# EAGLE board piezo-preamp-tickler_V0-3 (EAGLE 7.5.0)
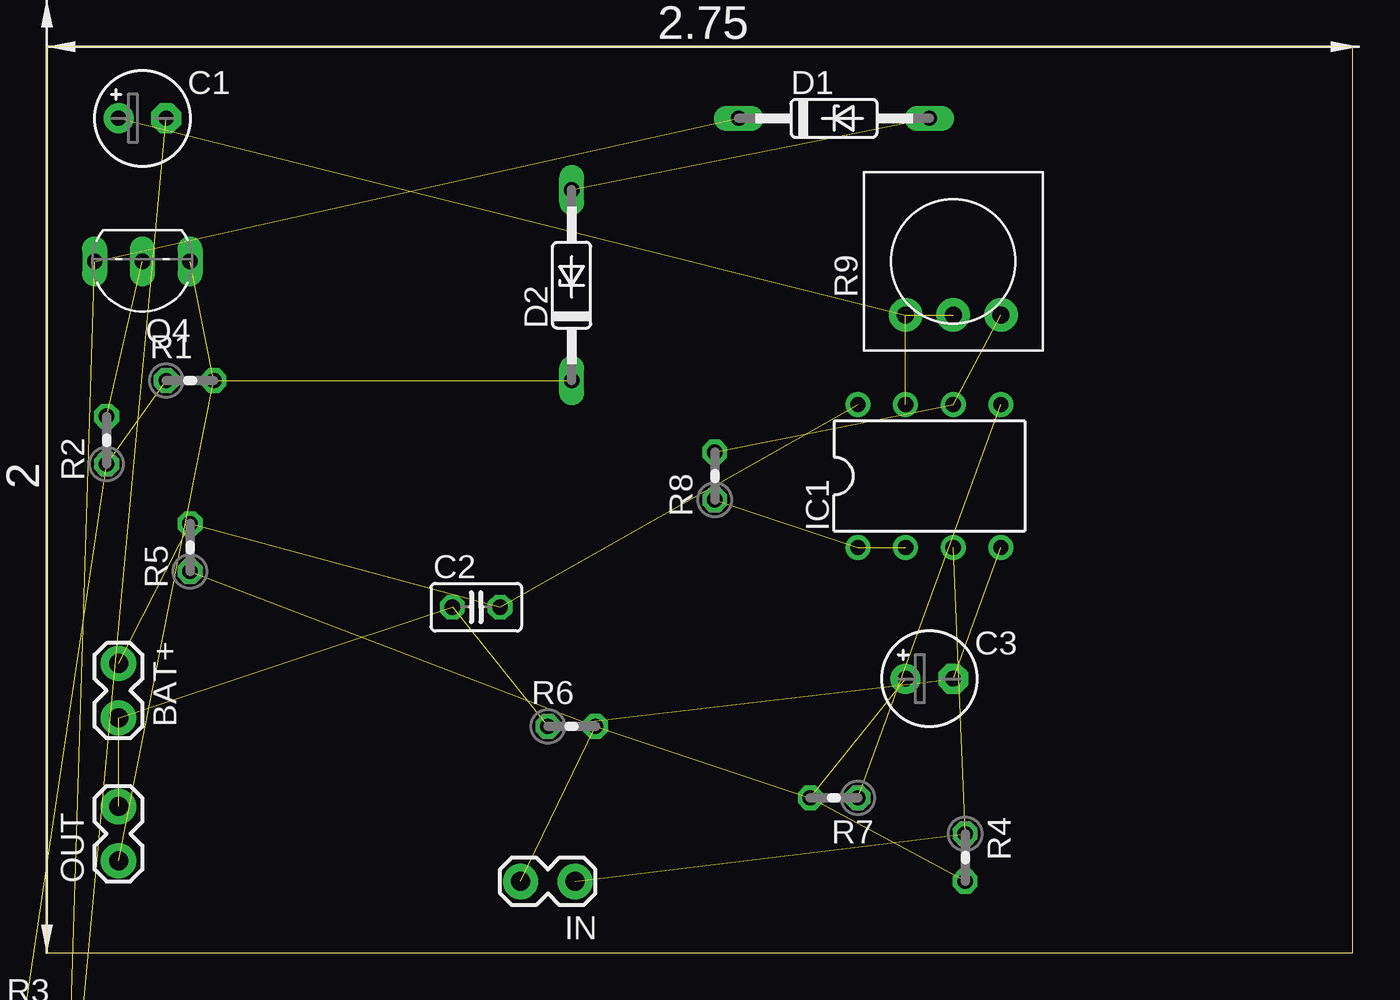
[diagram p0: board, top side]
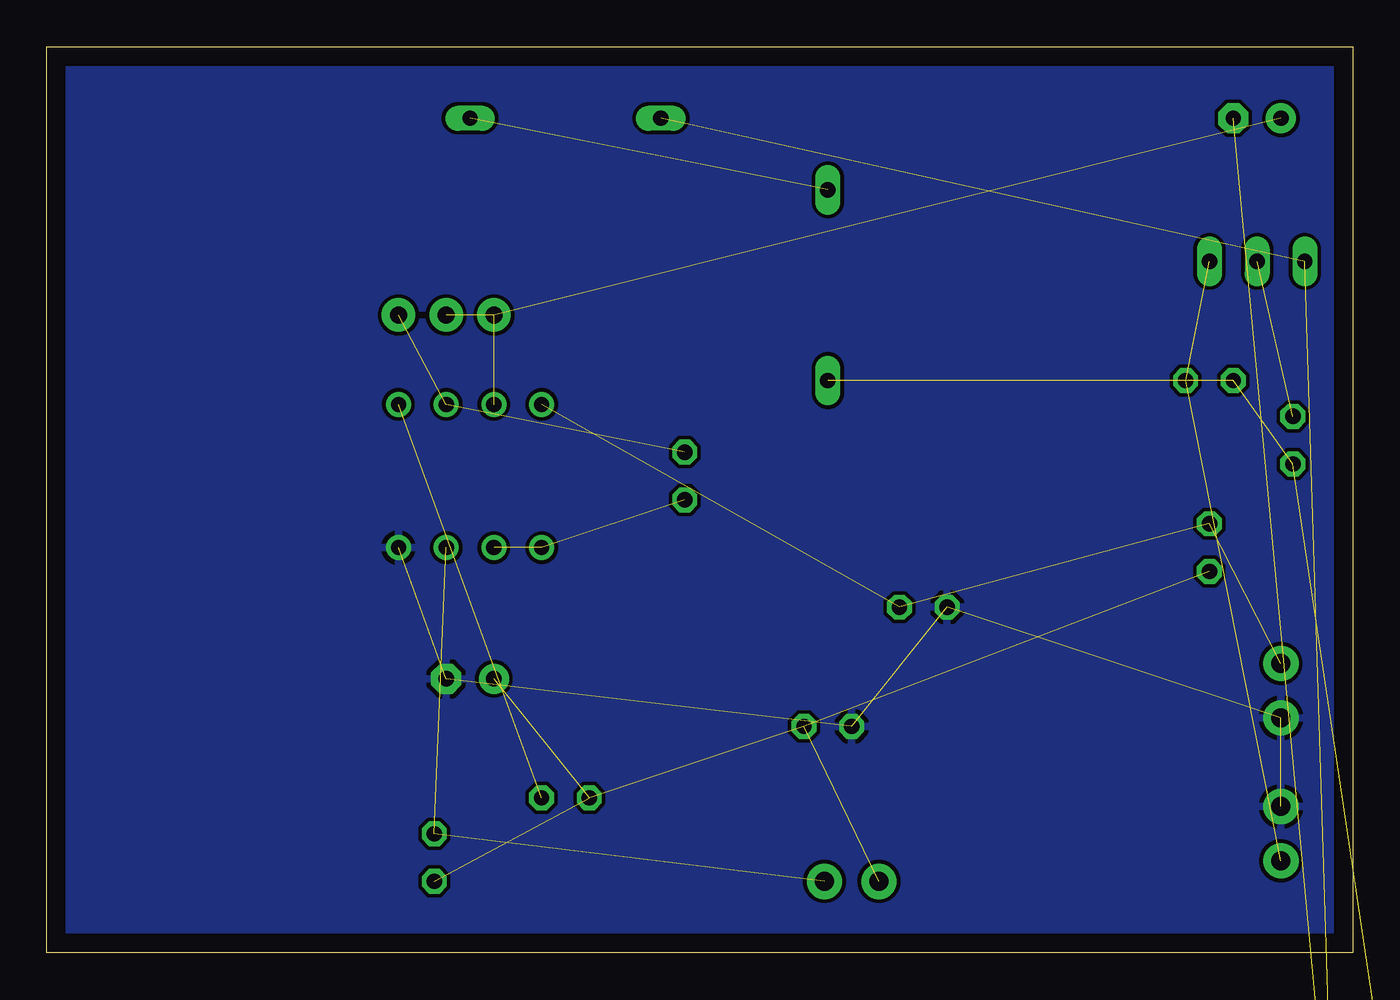
[diagram p1: board, bottom side, seen from below]

Size 69.52 x 48.25 mm. Coordinates in mm from the lower left corner, seen from the top.
Outline: 0,0 69.52,0 69.52,48.25 0,48.25 0,0
Copper layers (1*16): Top 0.035mm / dielectric 1.5mm / Bottom 0.035mm
Design rules "default *": minimum track width 10mil, minimum drill 24mil, track to track 8mil, track to pad 8mil, pad to pad 8mil, via to via 8mil, smd to smd 8mil, copper to edge 40mil, drill to drill 8mil, minimum pad ring 10mil, minimum via ring 8mil, stop-mask expansion 4mil, vias tented up to drill 0mil, thermal gap 10mil
Net classes: 0 default: width 0.6 mm, clearance 0.2 mm

## Footprints (pad centres in the part's own frame; a part is rotated, then mirrored left to right if it is on the bottom)
1X02_LOCK = drill 1.016 pad 1.88: 1 -0.178,0; 2 2.718,0
E2,5-5 = drill 0.813 pad 1.6: + -1.27,0 | drill 0.813 pad 1.6 octagon: - 1.27,0
C025-025X050 = drill 0.813 octagon: 1 -1.27,0; 2 1.27,0
DO35Z10 = drill 0.813 long: A 5.08,0; C -5.08,0
DIL08 = drill 0.813 pad 1.27: 1 -3.81,-3.81; 2 -1.27,-3.81; 3 1.27,-3.81; 4 3.81,-3.81; 5 3.81,3.81; 6 1.27,3.81; 7 -1.27,3.81; 8 -3.81,3.81
TO92- = drill 0.813 long: 1 2.54,0; 2 0,0; 3 -2.54,0
0204V = drill 0.813 octagon: 1 -1.27,0; 2 1.27,0
TRIM-3386 = drill 0.9 pad 1.778: 1 -2.54,-2.857; 2 0,-2.857; 3 2.54,-2.857

## Placement (x,y rotation side)
BAT+  [1X02_LOCK]  3.81,15.24 270 top
C1  10u  [E2,5-5]  5.08,44.45 0 top
C2  100n  [C025-025X050]  22.86,18.41 0 top
C3  10u  [E2,5-5]  46.99,14.61 0 top
D1  [DO35Z10]  41.91,44.45 0 top
D2  [DO35Z10]  27.94,35.56 90 top
IC1  TLC272  [DIL08]  46.99,25.4 0 top
IN  [1X02_LOCK]  27.94,3.81 180 top
OUT  [1X02_LOCK]  3.81,5.08 90 top
Q4  2N5484  [TO92-]  5.08,36.83 180 top
R1  10K  [0204V]  7.62,30.48 0 top
R2  1.2K  [0204V]  3.17,27.3 90 top
R3  1M  [0204V]  0,-3.81 0 top  (outside the outline)
R4  10k..10m  [0204V]  48.9,5.08 270 top
R5  150K  [0204V]  7.62,21.59 90 top
R6  100K  [0204V]  27.94,12.06 0 top
R7  1K  [0204V]  41.91,8.26 180 top
R8  1K  [0204V]  35.56,25.4 90 top
R9  [TRIM-3386]  48.26,36.83 0 top
R10  1K  [0204V]  0,-10.16 0 top  (outside the outline)

## Library data of the parts
BAT+ OUT = CMU-ArtFab
C1-C3 = rcl
D1 D2 = diode
IC1 = linear
IN = SparkFun-Connectors
Q4 = transistor-fet
R1-R8 R10 = resistor
R9 = adafruit

## Nets
GND: BAT+.2 C2.1 C3.- IC1.4 OUT.2 R6.1
N$1: D1.A D2.A
N$2: OUT.1 Q4.3 R1.2
N$3: Q4.2 R2.2
N$5: IC1.5 R7.1
N$6: C1.+ IC1.7 R9.1 R9.2
N$7: IC1.6 R8.2 R9.3
N$8: C3.+ IN.2 R4.2 R5.1 R6.2 R7.2
N$9: IC1.3 IN.1 R4.1
N$10: D1.C Q4.1 R3.2 R10.1
N$11: C1.- R10.2
N$14: IC1.1 IC1.2 R8.1
R3: D2.C R1.1 R2.1 R3.1
V9V: BAT+.1 C2.2 IC1.8 R5.2

## Tracks (layer width: path | path; a pad name or v marks a point on that pad's centre or on a via)
GND  (5 unrouted)
  pour Bottom: 0,48.26 69.85,48.26 69.85,0 0,0
N$1  (1 unrouted)
N$2  (2 unrouted)
N$3  (1 unrouted)
N$5  (1 unrouted)
N$6  (3 unrouted)
N$7  (2 unrouted)
N$8  (5 unrouted)
N$9  (2 unrouted)
N$10  (3 unrouted)
N$11  (1 unrouted)
N$14  (2 unrouted)
R3  (3 unrouted)
V9V  (3 unrouted)